# Altium PCB mightyFan.PcbDoc
Units mm, origin at the board's own origin, x right, y up, seen from the top; angles counter-clockwise.
Board outline 26 x 18 mm, 2 copper layers (Top Layer, Bottom Layer); 20 components, 14 nets, 78 pads, 4 vias.
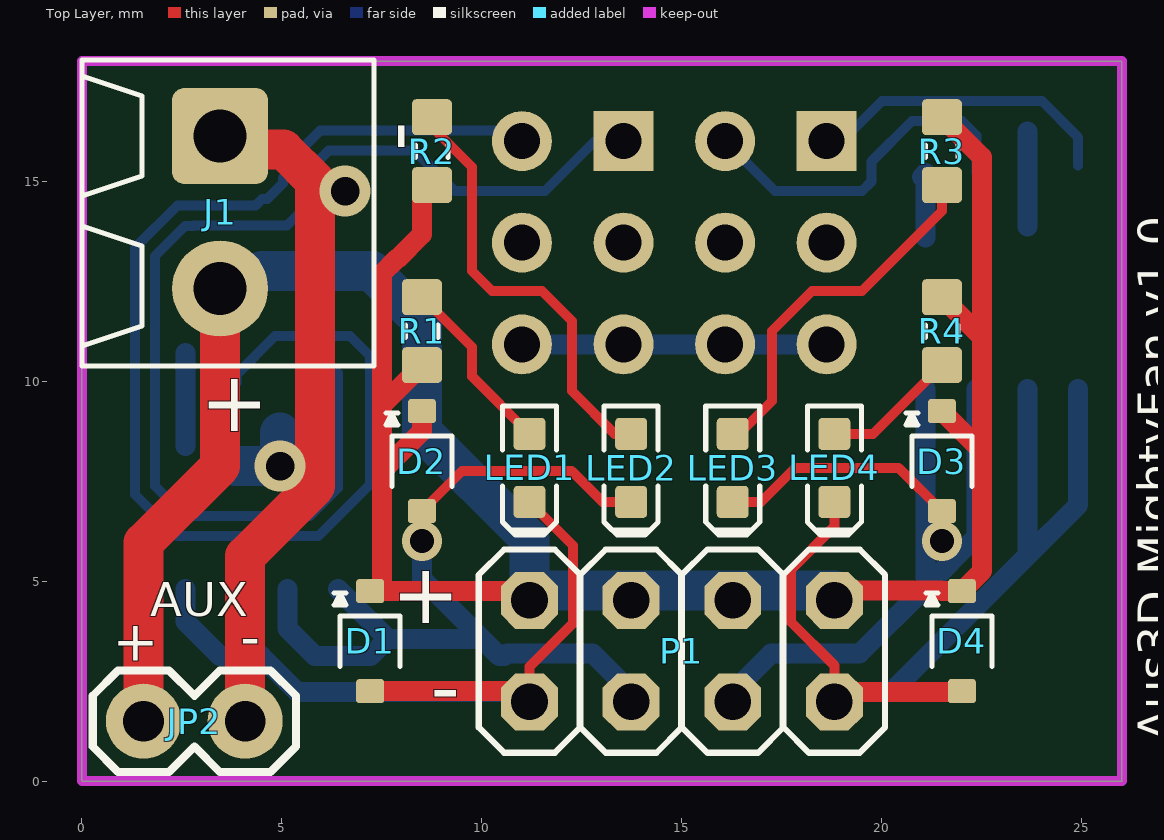
[diagram p0: Top Layer view]
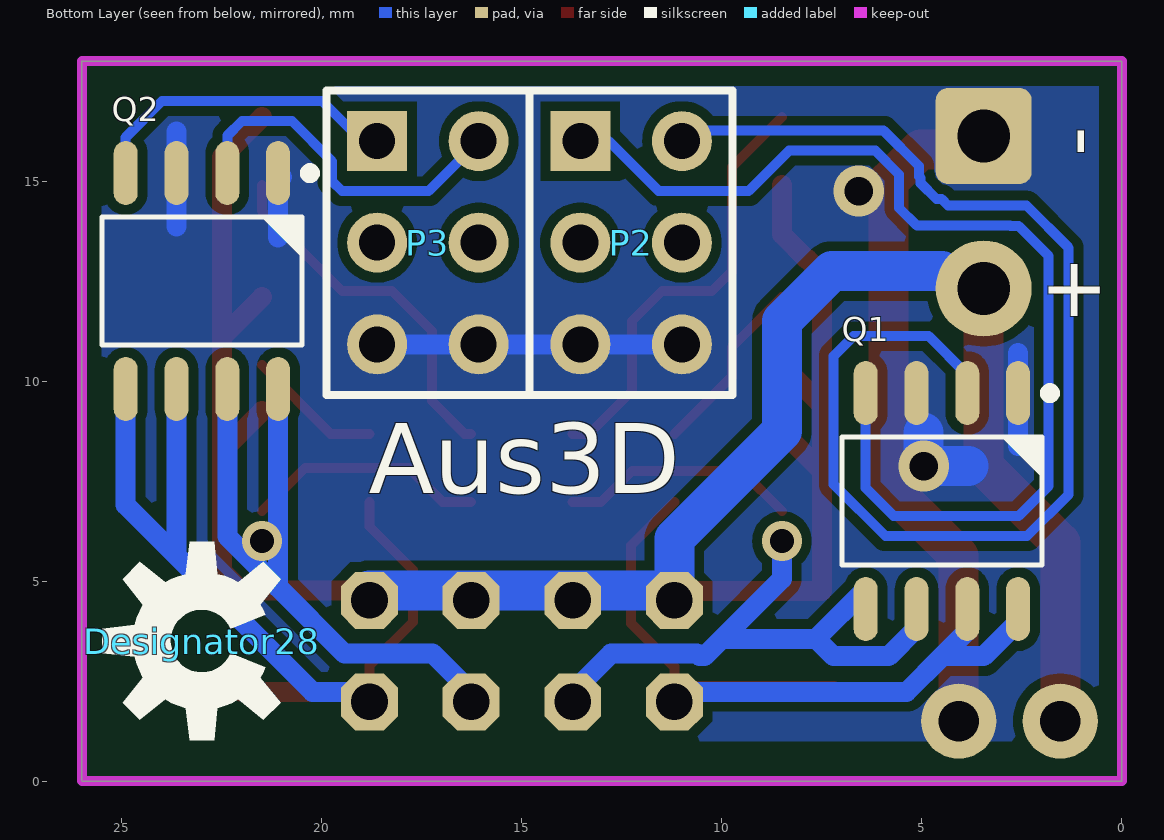
[diagram p1: Bottom Layer view, seen from below]
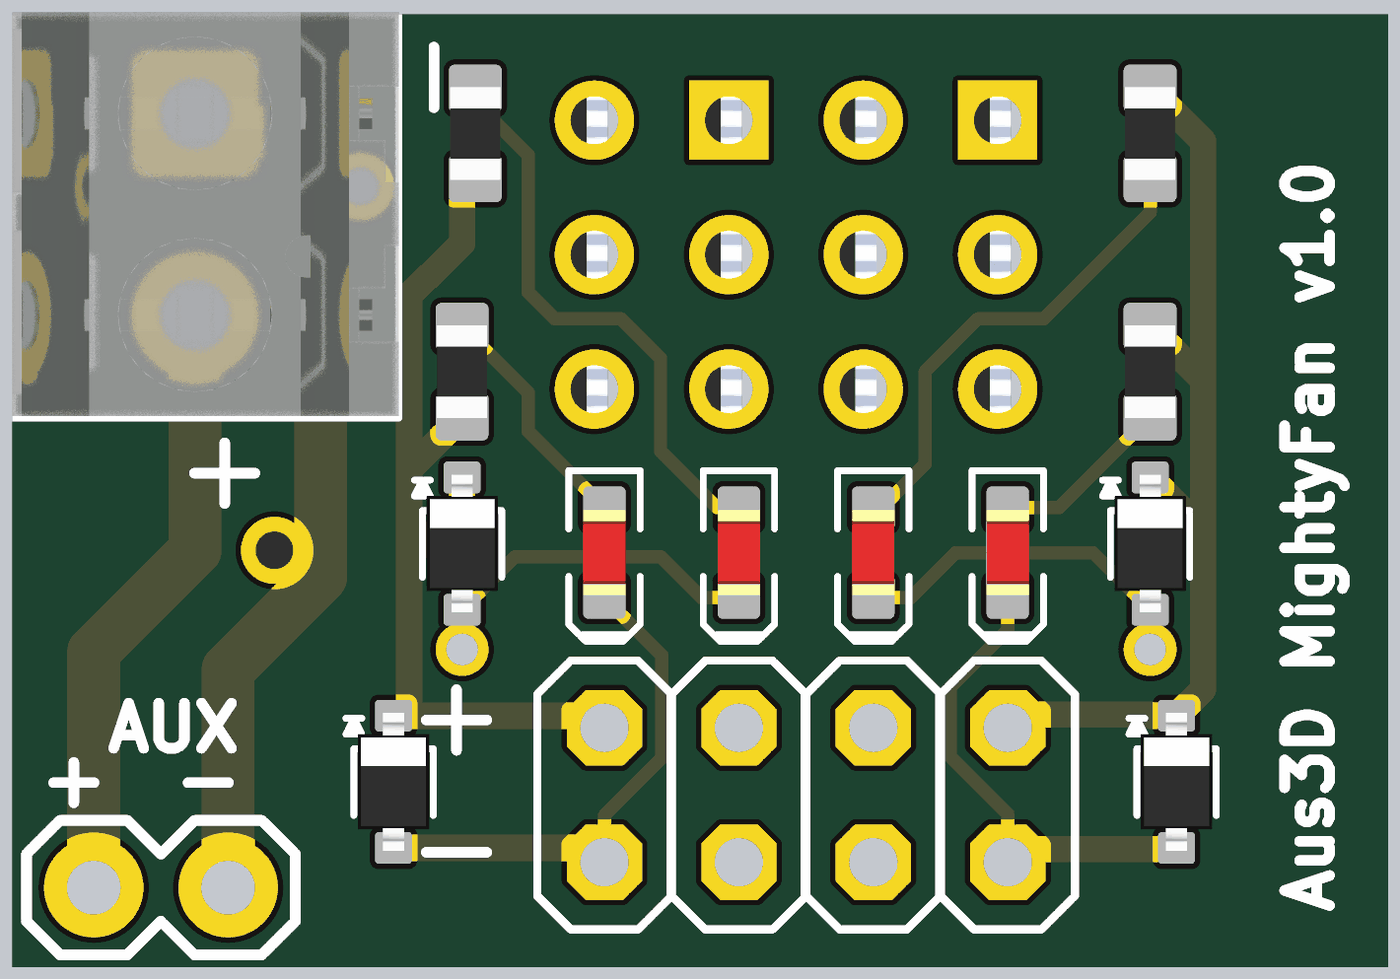
[diagram p2: 3D render of the assembled board from above, using the file's embedded part models]
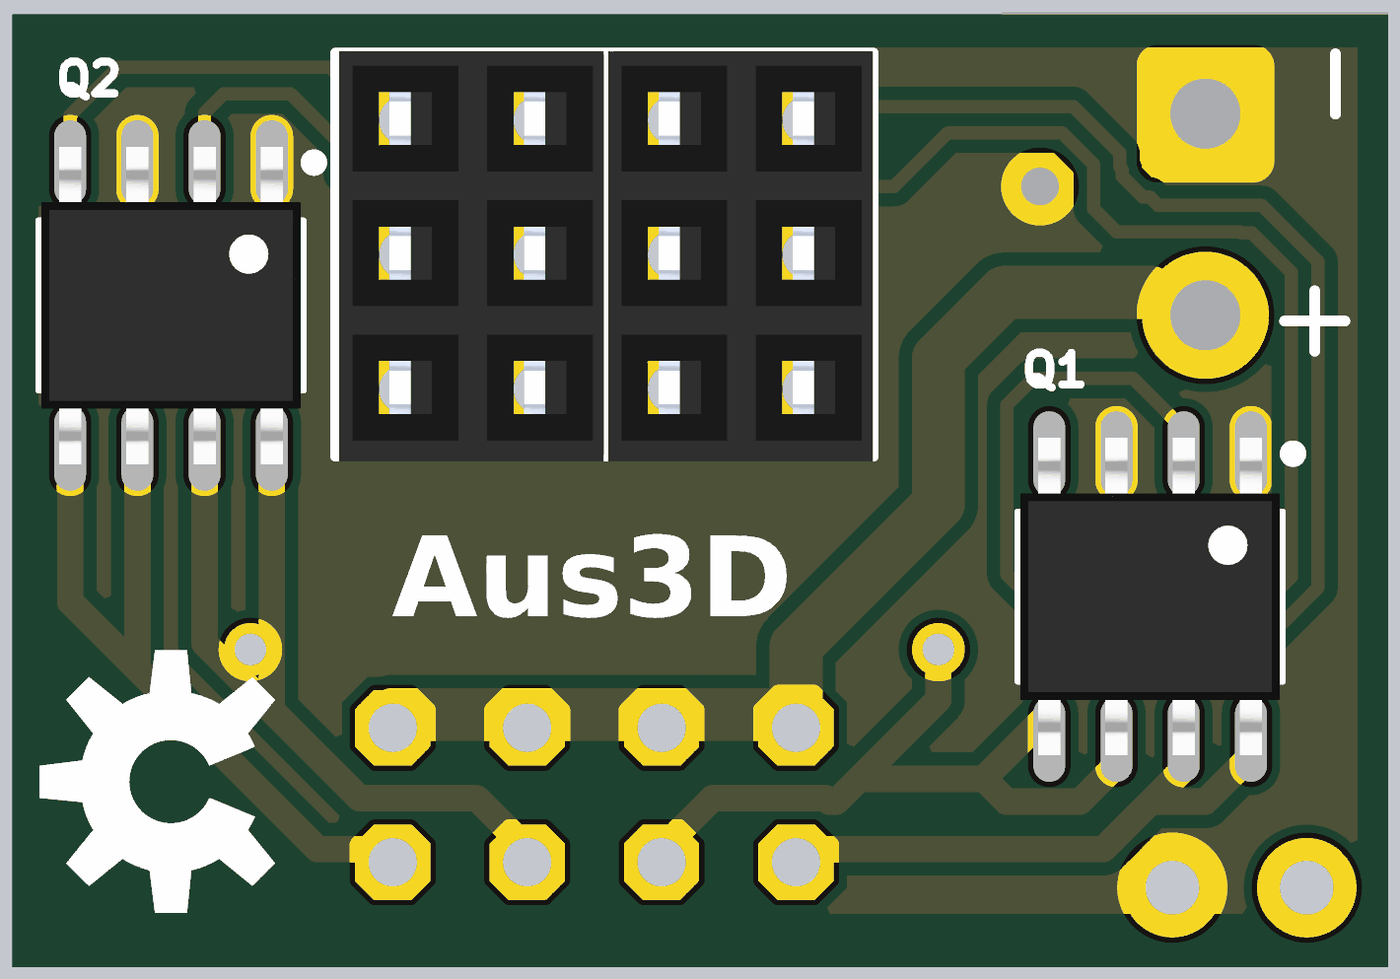
[diagram p3: 3D render of the assembled board from below, using the file's embedded part models]

## Layer stack, top to bottom
Top Solder: solder mask 0.0102, Solder Resist, Dk 3.5
Top Layer: signal copper 0.0356
Dielectric1: dielectric 0.32, FR-4, Dk 4.8
Bottom Layer: signal copper 0.0356
Bottom Solder: solder mask 0.0102, Solder Resist, Dk 3.5

## Board outline
0,0 26,0 26,18 0,18

## Design rules (kind name [scope] priority, off if disabled: settings)
Clearance [All] p1: gap=0.25
ComponentClearance ComponentClearance_1 [(InComponent('P2') OR InComponent('P3')) vs (InComponent('P2') OR InComponent('P3'))] p1: gap=0.001 collisioncheckmode=3 verticalgap=0.01 showdistances=FALSE
ComponentClearance [All] p2: gap=0.254 collisioncheckmode=3 verticalgap=0.254 showdistances=FALSE
FabricationTestPointUsage TestPointUsage [All] p1: valid=0 allowmultiple=FALSE
FabricationTestpoint Testpoint [All] p1: side=3 testpointundercomponent=TRUE minsize=1.016 maxsize=2.54 preferedsize=1.524 minholesize=0 maxholesize=1.016 preferedholesize=0.813 testpointgrid=0.025 allowsidetop=TRUE allowsidebottom=TRUE usegrid=TRUE gridtolerance=0
PolygonConnect [All] p1: connectstyle=Direct reliefconductorwidth=0.5 reliefentries=4 polygonreliefangle="90 Angle" airgapwidth=0.2
RoutingVias [All] p1: holewidth=0.6 width=1 viastyle="Through Hole" minholewidth=0.6 minwidth=1 maxholewidth=0.6 maxwidth=1
SilkToSolderMaskClearance SilkscreenOverComponentPads [IsPad] p1: minsilkscreentomaskgap=0.254 clearancetoexposedcopper=TRUE
SolderMaskExpansion [All] p1: expansion=0.102
Width Width_Power [(InNet('12V') OR InNet('GND') OR InNet('FAN1') OR InNet('FAN2') OR InNet('FAN3') OR InNet('FAN4'))] p1: maxlimit=1 minlimit=0.25 preferedwidth=0.5 minimp=50.000000 maximp=50.000000 favimp=50.000000
Width Width_Power_1 [(InNet('12V'))] p2: maxlimit=1 minlimit=1 preferedwidth=1 minimp=50.000000 maximp=50.000000 favimp=50.000000
Width [All] p3: maxlimit=0.25 minlimit=0.25 preferedwidth=0.25 minimp=50.000000 maximp=50.000000 favimp=50.000000
26 further rules are at their usual default settings.

## Components (designator, comment, footprint, x,y, rotation, side; value= is the part's Value field where it differs from the comment)
D1 "DIODE_75V_500mW" SOD323 7.205,3.5 r270 top
D2 "DIODE_75V_500mW" SOD323 8.5,8 r270 top
D3 "DIODE_75V_500mW" SOD323 21.5,8 r270 top
D4 "DIODE_75V_500mW" SOD323 22,3.5 r270 top
Designator28 "Comment" OSHW-LOGO-M 23,3.5 r90 bottom
J1 "Stackable ScrewTerm" 2P_PCB_ScrewTerm_90S_3.81MM 3.455,16.125 r180 top locked
JP2 "Standard 2-pin 0.1\" header. Use with  - straight break away headers ( PRT-00116) - right angle break away headers (PRT-00553) - swiss pins (PRT-00743) - machine pins (PRT-00117) - female headers (PRT-00115)   Molex polarized connector foot print use with: PRT-08233 with associated crimp pins and housings.  2.54_SCREWTERM for use with  PRT-10571.  3.5mm Screw Terminal footprints for  PRT-08084  5mm Screw Terminal footprints for use with PRT-08432" 1X02 4.08,1.5 r180 top
LED1 "Red" LED-0603-RED 11.19,7.83 r270 top
LED2 "Red" LED-0603-RED 13.73,7.83 r270 top
LED3 "Red" LED-0603-RED 16.27,7.83 r270 top
LED4 "Red" LED-0603-RED 18.81,7.83 r270 top
P1 "Header 4X2" 2X4 15,3.25 r180 top
P2 "Header 3X2" Header-3x2-female 13.54,16 r180 bottom
P3 "Header 3X2" Header-3x2-female 18.62,16 r180 bottom
Q1 "MOSFET_AO4818B" SOIC127P600X175-8AN 4.5,7 r270 bottom
Q2 "MOSFET_AO4818B" SOIC127P600X175-8AN 23,12.5 r270 bottom
R1 "Thick Film" RESC1608X55N 8.5,11.25 r90 top
R2 "Thick Film" RESC1608X55N 8.75,15.75 r90 top
R3 "Thick Film" RESC1608X55N 21.5,15.75 r270 top
R4 "Thick Film" RESC1608X55N 21.5,11.25 r270 top

## Footprints (in the part's own frame and the unit in brackets; to place one, negate y for a bottom-side part, rotate by r counter-clockwise, add the part's x,y. Pads: shape width x height; smd on the part's side, far side on the other; paste and mask are expansions set on the pad)
1X02 [mil]
  round 74 hole 40: 1(0,0) 2(100,0)
  silkscreen extent -50,-50 150,50
2P_PCB_ScrewTerm_90S_3.81MM [mm] "TERM BLOCK 2POS SIDE ENT STACKABLE 3.81MM"
  rrect25% 2.4x2.4 hole 1.321: 1(0,0)
  round 2.4 hole 1.321: 2(0,3.81)
  silkscreen extent -3.85,-1.9 3.45,5.75, body extent -3.85,-1.91 3.45,5.71, height 8.5
2X4 [mil] "2X4"
  oct 56x56 hole 36: 1(-150,-50) 2(-150,50) 3(-50,-50) 4(-50,50) 5(50,-50) 6(50,50) 7(150,-50) 8(150,50)
  silkscreen extent -200,-100 200,100
Header-3x2-female [mm]
  rect 1.5x1.5 hole 0.9: 1(0,0)
  round 1.5 hole 0.9: 2(2.54,0) 3(0,-2.54) 4(2.54,-2.54) 5(0,-5.08) 6(2.54,-5.08)
  silkscreen extent -1.27,-6.35 3.81,1.27, body extent -1.2,-6.45 3.8,1.3, height 8.55
LED-0603-RED [mm]
  round 0.254 on Mech15: 0(0,0)
  rrect25% 0.8x0.8 smd: A(-0.85,0) K(0.85,0)
  Top Layer pour cut-out: -0.5,0.5 0.5,0.5 0.5,-0.5 -0.5,-0.5
  silkscreen extent -1.55,-0.68 1.67,0.68, body extent -0.8,-0.4 0.8,0.4, height 0.75
OSHW-LOGO-M [mm]
  silkscreen extent -2.48,-1.97 2.49,2.49
RESC1608X55N [mm] "Chip Resistor, Body 1.6x0.8mm, EIA 0603, IPC Medium Density"
  round 0.254 on Mech15: 0(0,0)
  rrect25% 0.9x1 smd: 1(-0.85,0) 2(0.85,0)
  Top Layer pour cut-out: -0.6,0.5 -0.4,0.7 0.4,0.7 0.6,0.5 0.6,-0.5 0.4,-0.7 -0.4,-0.7 -0.6,-0.5
  silkscreen extent -0.15,-0.41 0.15,0.41, body extent -0.87,-0.47 0.88,0.48, height 0.54
SOD323 [mm] "SOD-323; 2 Leads; Body 1.8 x 1.35 mm, (LxW)"
  round 0.508 on Mech15: 0(0,0)
  rrect25% 0.6x0.7 smd: A(1.25,0) K(-1.25,0)
  silkscreen extent -1.2,-0.9 0.64,0.75, body extent -1.3,-0.68 1.3,0.68, height 1.1
SOIC127P600X175-8AN [mm] "SOIC, 8-Leads, Body 4.9x3.9mm, Pitch 1.27mm, IPC Medium Density"
  round 1 on Mech15: 0(0,0)
  oval 1.6x0.6 smd: 1(-2.7,1.905) 2(-2.7,0.635) 3(-2.7,-0.635) 4(-2.7,-1.905) 5(2.7,-1.905) 6(2.7,-0.635) 7(2.7,0.635) 8(2.7,1.905)
  silkscreen extent -2.82,-2.5 1.6,2.82, body extent -3,-2.45 3,2.45, height 1.75

## Part data
D1 D2 D3 D4: "Diode SMD 300mA 0.5W SOD323"
Designator28: library part OSHW-LOGOM
J1: library part 2P_ScrewTerm_90S_3.81MM, "Terminal Block Screw Type THT 2-Position 3.81mm pitch"
JP2: library part M02PTH
LED1 LED2 LED3 LED4: library part LED_SMD_Red_0603_220mcd, "LED 0603 SMD Hyper Red 630nm 220mcd 20mA"
P1: "Header, 4-Pin, Dual row"
P2 P3: "Header, 3-Pin, Dual row"
Q1 Q2: "MOSFET Dual-Channel 30V 8.5A SOIC-8 SMD"
R1 R2 R3 R4: library part RES_330R_0603_5%, "Resistor SMD chip 330 Ohm 0.1W 5% 0603"

## Via types
v1: diameter 1, hole 0.6, Top Layer to Bottom Layer, 2 vias
v2: diameter 1.27, hole 0.711, Top Layer to Bottom Layer, 2 vias

## Nets (pads, with @x,y where several pads share a name; then routed paths per layer and width w, separated by ;. In a path a pad name is that pad's centre, name@x,y a point inside that pad or via, vN(x,y) a via of type N, cw(c..) or ccw(c..) an arc to the next point about the centre after c; other vN are vias at no path point)
12V: D1.K D2.K D3.K D4.K J1.2 JP2.2 P1.1 P1.3 P1.5 P1.7 R1.1 R2.1 R3.1 R4.1 | length 67.5
  Top Layer w0.5: D2.K 8.5,8.75 7.5,7.75 ; R1.1 7.5,9.4 ; R2.1@8.5,14.9 8.5,13.67 7.88,13.05 7.859,13.05 7.5,12.691 7.5,9.4 ; P1.7@11.17,4.75 7.5,4.75 7.5,7.75 ; P1.1@18.81,4.77 21.48,4.77 ; 21.5,4.75 D4.K 22.5,5.25 22.5,8.25 ; D3.K 22.5,8.25 ; R4.1 22.5,11.1 ; R3.1 22.5,15.6 22.5,11.1 ; 7.5,7.75 7.5,9.4 ; 22.5,8.25 22.5,11.1
  Top Layer w1: JP2.2@1.54,2 1.54,5.96 3.455,7.875 J1.2@3.455,12.705
  Bottom Layer w1: J1.2@4.5,12.75 7.25,12.75 8.5,11.5 8.5,8.75 11.19,6.06 11.19,4.77 13.73,4.77 16.27,4.77 P1.1@18.81,4.77
FAN1: D1.A LED1.K P1.8 Q1.7 Q1.8 | length 21.4
  Top Layer w0.25: P1.8@11.19,2.23 11.19,2.86 12.276,3.946 12.276,5.894 LED1.K
  Top Layer w0.5: D1.A P1.8@11.17,2.25
  Bottom Layer w0.5: Q1.8@2.595,4.8 2.595,3.985 3.455,3.125 4.491,3.125 ; Q1.7@3.865,4.55 Q1.7 3.865,3.751 4.491,3.125 ; P1.8@11.19,2.23 5.386,2.23 4.491,3.125
FAN1_PWM: P2.2 Q1.2 | length 31.6
  Bottom Layer w0.25: Q1.2@3.865,9.95 3.865,10.16 4.83,11.125 6.705,11.125 7.205,10.625 7.205,7.418 5.912,6.125 2.373,6.125 1.33,7.168 1.33,13.332 2.388,14.39 4.345,14.39 4.505,14.55 4.635,14.55 5.03,14.945 5.03,15.076 5.07,15.116 5.07,15.375 5.955,16.26 10.74,16.26 P2.2
FAN2: D2.A LED2.K P1.6 Q1.5 Q1.6 | length 21.4
  Top Layer w0.25: D2.A 9.505,7.755 12.245,7.755 13.02,6.98 LED2.K
  Bottom Layer w0.5: Q1.6@5.135,4.8 5.135,3.82 5.83,3.125 7.212,3.125 7.646,3.559 ; Q1.5@6.405,4.8 7.646,3.559 ; v1(8.5,6) 8.5,5.059 10,3.559 ; P1.6@13.73,2.23 12.769,3.191 10.627,3.191 10.561,3.125 10.434,3.125 10,3.559 ; 7.646,3.559 10,3.559
FAN2_PWM: P2.1 Q1.4 | length 28
  Bottom Layer w0.25: Q1.4@6.405,10.2 6.405,7.325 5.705,6.625 2.58,6.625 1.83,7.375 1.83,13.125 2.58,13.875 2.788,13.875 2.803,13.89 5.129,13.89 5.57,14.331 5.57,15.168 6.162,15.76 8.32,15.76 9.33,14.75 11.58,14.75 12.83,16 P2.1
FAN3: D3.A LED3.K P1.4 Q2.7 Q2.8 | length 22.4
  Top Layer w0.25: LED3.K 16.98,6.98 17.83,7.83 20.42,7.83 D3.A
  Bottom Layer w0.5: P1.4@16.27,2.23 17.231,3.191 19.441,3.191 21.095,4.845 ; Q2.8 21.095,4.845 ; Q2.7 22.365,6.115 21.095,4.845
  other v1: 21.5,6
FAN3_PWM: P3.2 Q2.2 | length 8.9
  Bottom Layer w0.25: P3.2 17.33,14.75 19.5,14.75 19.745,14.995 19.745,15.495 20.75,16.5 22,16.5 22.365,16.135 Q2.2
FAN4: D4.A LED4.K P1.2 Q2.5 Q2.6 | length 23.9
  Top Layer w0.25: P1.2@18.81,2.23 18.81,2.895 17.724,3.981 17.724,5.281 18.81,6.367 LED4.K
  Top Layer w0.5: P1.2@18.81,2.23 D4.A@22,2.23
  Bottom Layer w0.5: P1.2@18.81,2.23 20.23,2.23 23.635,5.635 ; Q2.6 23.635,5.635 ; Q2.5 24.905,6.905 23.635,5.635
FAN4_PWM: P3.1 Q2.4 | length 7.8
  Bottom Layer w0.25: P3.1 19,16 20,17 24,17 24.905,16.095 Q2.4@24.905,15.385
GND: J1.1 JP2.1 P2.5 P2.6 P3.5 P3.6 Q1.1 Q1.3 Q2.1 Q2.3 | length 31.7
  Top Layer w1: J1.1@4,15.79 5.04,15.79 5.83,15 ; JP2.1@4.08,2 4.08,5.625 5.83,7.375 5.83,14.75
  Bottom Layer w0.5: 2.595,8.375 2.595,10.7 ; P2.6 P2.5 P3.6 P3.5 ; Q2.1@21,15.105 Q2.1 21.095,13.595 ; 23.635,13.865 Q2.3 23.635,16.24
  Bottom Layer w1: 3.83,7.875 v2(4.955,7.875) 4.955,8.71
  other v2: 6.58,14.75
NetLED1_A: LED1.A R1.2 | length 4.5
  Top Layer w0.25: R1.2 9.75,10.85 9.75,10.12 LED1.A
NetLED2_A: LED2.A R2.2 | length 11.1
  Top Layer w0.25: R2.2@8.5,16.6 9.75,15.35 9.75,12.75 10.25,12.25 11.5,12.25 12.25,11.5 12.25,9.75 13.32,8.68 LED2.A
NetLED3_A: LED3.A R3.2 | length 9.2
  Top Layer w0.25: LED3.A 16.43,8.68 17.25,9.5 17.25,11.25 18.25,12.25 19.5,12.25 21.5,14.25 R3.2
NetLED4_A: LED4.A R4.2 | length 3.4
  Top Layer w0.25: LED4.A 19.78,8.68 R4.2
pads on no net: D1.0 D2.0 D3.0 D4.0 LED1.0 LED2.0 LED3.0 LED4.0 P2.3 P2.4 P3.3 P3.4 Q1.0 Q2.0 R1.0 R2.0 R3.0 R4.0

## Polygon pours and split planes (outlines as drawn)
GND on Bottom Layer "GND" (solid, remove dead copper, pour order 0): 0.58,17.375 0.58,1 25.5,1 25.5,17.375

## Keep-outs
Keep-Out Layer:
  the board outline again, w0.254

## Silkscreen, mask and mechanical layers (free items; w line width, h text height)
Top Overlay:
  lines w0.18: 12.45,1.35 12.45,5.15 ; 14.99,1.35 14.99,5.15 ; 17.53,1.35 17.53,5.15
  text "-" at 8.55,15.75 h1.5 r90
  text "+" at 2.955,8.75 h1.5
  text "+" at 9.455,5.25 h1.5 r180
  text "AUX" at 1.705,4.125 h0.85
  text "+" at 1.915,3.875 h1 r180
  text "-" at 4.455,3.875 h1 r180
  text "-" at 9.455,2.75 h1.5 r180
  text "Aus3D MightyFan v1.0" at 27.25,1 h0.85 r90
Bottom Overlay:
  text "-" at 1.58,15.625 h1.5 r90
  text "+" at 0.33,11.625 h1.5
  text "Aus3D" at 18.83,6.625 h3
Mechanical 16:
  drawing of 1874 lines, arcs and shapes, not listed
  text "1" at -98.754,97.111 h0.8
  text "2" at -26.11,97.111 h0.8
  text "3" at 47.042,97.111 h0.8
  text "4" at 119.94,97.111 h0.8
  text "A" at -133.095,74.099 h0.8
  text "A" at 153.925,74.099 h0.8
  text "B" at -133.095,26.042 h0.8
  text "B" at 153.925,26.042 h0.8
  text "C" at -133.095,-22.472 h0.8
  text "C" at 153.925,-22.472 h0.8
  text "ENGINEER:" at 38.99,-59.48 h0.8
  text "TITLE:" at 77.09,-59.48 h0.8
  text "PCB DESIGNER:" at 38.99,-66.973 h0.8
  text "D" at -133.095,-70.478 h0.8
  text "D" at 153.925,-70.478 h0.8
  text "DATE:" at 38.99,-74.72 h0.8
  text "PART NO.:" at 77.09,-74.72 h0.8
  text "REV:" at 130.43,-74.72 h0.8
  text "Altium Limited" at 5.97,-77.26 h0.8
  text ".PRINT_DATE" at 40.26,-77.768 h0.8
  text "12a Rodborough Rd" at 5.97,-79.8 h0.8
  text "Frenchs Forest" at 5.97,-82.34 h0.8
  text "FILE NAME:" at 38.99,-82.34 h0.8
  text "DWG NO:" at 77.09,-82.34 h0.8
  text "SCALE:" at 130.43,-82.34 h0.8
  text "NSW 2086" at 5.97,-84.88 h0.8
  text ".PCB_FILE_NAME_NO_PATH" at 40.26,-85.388 h0.8
  text "1" at -98.754,-90.849 h0.8
  text "2" at -26.11,-90.849 h0.8
  text "3" at 47.042,-90.849 h0.8
  text "4" at 119.94,-90.849 h0.8

## Dimensions
0,0 to 0,18 on Mechanical 1
0,18 to 26,18 on Mechanical 1